# Altium PCB EB2_Cyclone_1_03.PcbDoc (part 2 of 4)
Units mm, origin at the board's own origin, x right, y up, seen from the top; angles counter-clockwise.
Board outline 165.1 x 115.01 mm, 6 copper layers (Top Layer, MidLayer1, VCC Plane, GND Plane, MidLayer2, Bottom Layer); 336 components, 379 nets, 1581 pads, 731 vias.
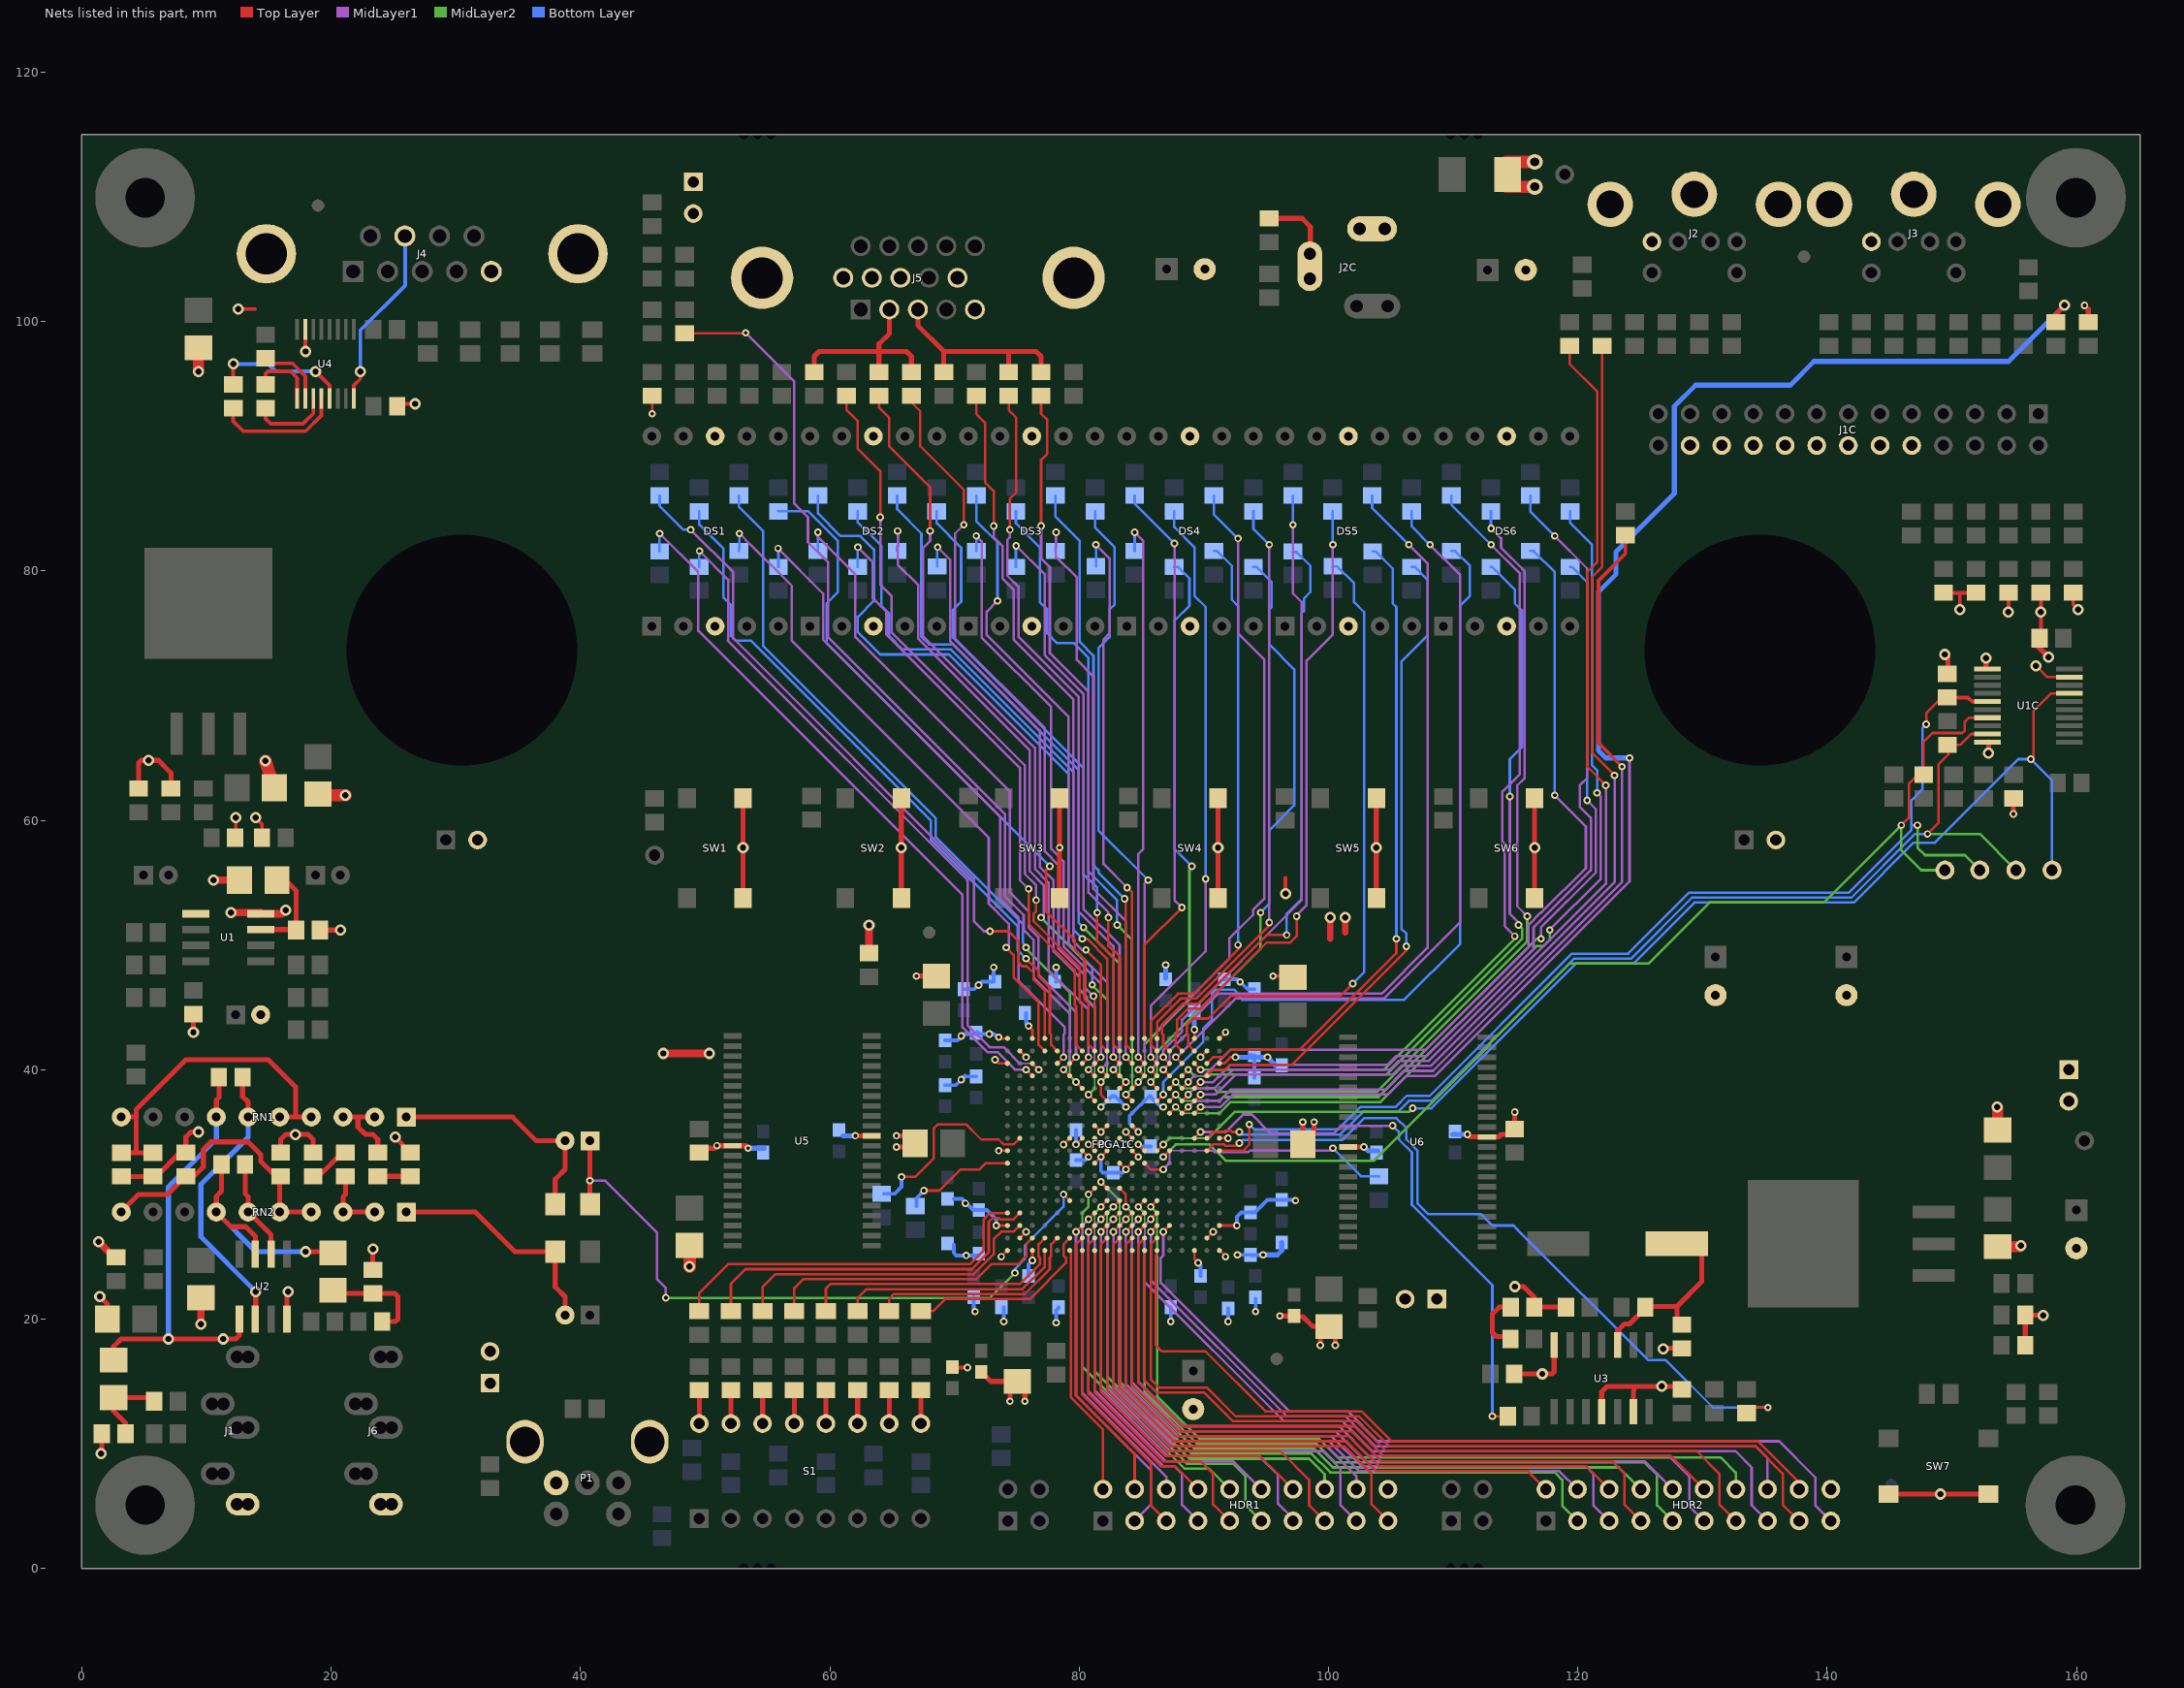
[diagram p6: the nets of this part, all layers, seen from the top]

## Via types
v1: diameter 0.6, hole 0.3, Top Layer to Bottom Layer, tented both sides, 433 vias
v2: diameter 1.6, hole 1, Top Layer to Bottom Layer, 191 vias
v3: diameter 0.9, hole 0.5, Top Layer to Bottom Layer, tented both sides, 105 vias
v4: diameter 1.27, hole 0.7, Top Layer to Bottom Layer, tented both sides, 2 vias

## Nets (pads, with @x,y where several pads share a name; then routed paths per layer and width w, separated by ;. In a path a pad name is that pad's centre, name@x,y a point inside that pad or via, vN(x,y) a via of type N, cw(c..) or ccw(c..) an arc to the next point about the centre after c; other vN are vias at no path point) (continued)
AUDIOR: C6.1 C40.1 FPGA1C.P6 | length 55.3
  Top Layer w0.2: v1(78.75,30) FPGA1C.P6@79.25,29.5
  Top Layer w0.4: C40.1@40.767,34.29 40.767,29.213 C6.1@40.77,29.21
  MidLayer1 w0.2: v1(40.75,31.1) 41.95,31.1 46.15,26.9 46.15,23.2 46.85,22.5 v1(46.85,21.7)
  MidLayer2 w0.2: v1(46.85,21.7) 49.316,21.7 69.35,21.7 72.85,21.7 v1(74.85,23.7) v1@74.75,23.6
  Bottom Layer w0.2: v1(74.85,23.7) 74.85,24 75.65,24.8 75.65,25.9 78.75,29 v1(78.75,30)
BLUE0: FPGA1C.B9 R106.1 | length 57.1
  Top Layer w0.2: R106.1@71.75,94.05 71.75,92.6 72.45,91.9 72.45,87.1 73.15,86.4 v1(73.15,83.6) ; v1(80.55,49.6) 81.75,48.4 81.75,42 FPGA1C.B9@82.25,41.5
  MidLayer1 w0.2: v1(73.15,83.6) 73.15,82.7 73.85,82 73.85,79.4 74.75,78.5 74.75,74.5 79.55,69.7 79.55,50.3 80.25,49.6 v1(80.55,49.6)
BLUE1: FPGA1C.C10 R108.1 | length 57.8
  Top Layer w0.2: R108.1@74.35,94.05 74.35,92.9 74.95,92.3 74.95,86.3 74.45,85.8 v1(74.45,83.3) ; v1(82.75,41) FPGA1C.C10@83.25,40.5
  MidLayer1 w0.2: v1(74.45,83.3) 74.45,82.7 74.25,82.5 74.25,79.6 75.15,78.7 75.15,74.7 79.95,69.9 79.95,52.7 82.75,49.9 v1(82.75,41)
BLUE2: FPGA1C.A10 R111.1 | length 54.6
  Top Layer w0.2: v1(76.95,83.6) 76.95,88.9 77.45,89.4 77.45,92.1 76.95,92.6 R111.1@76.95,94.05 ; v1(82.35,52.2) 82.35,49.931 82.816,49.466 ; 82.85,49.5 83.25,49.1 FPGA1C.A10@83.25,42.5
  MidLayer1 w0.2: v1(76.95,83.6) 76.95,81 77.65,80.3 77.65,73.4 80.75,70.3 80.75,54.2 82.35,52.6 v1(82.35,52.2)
BLUE#: J5.3 R107.2 R108.2 R111.2 | length 16.7
  Top Layer w0.4: J5.3@67.064,100.965 67.064,99.686 69.15,97.6 ; R107.2@69.15,95.95 69.15,97.6 ; R108.2@74.35,95.95 74.35,97.6 ; R111.2@76.95,96 76.95,97.2 76.55,97.6 74.35,97.6 ; 69.15,97.6 74.35,97.6
CTS: J4.7 U4.8 | length 14.8
  Top Layer w0.3: U4.8@21.825,93.825 21.825,94.875 22.35,95.4 v3(22.35,96)
  Bottom Layer w0.3: v3(22.35,96) 22.35,99.3 25.95,102.9 25.95,106.825 J4.7@25.92,106.855
DIG0_SEG0: FPGA1C.E7 R25.2 | length 59
  Top Layer w0.2: v1(79.75,39) FPGA1C.E7@80.25,38.5
  MidLayer2 w0.14: 79.25,39.5 79.25,41.5
  MidLayer2 w0.2: v1@75.65,49.8 75.7,49.75 77.55,47.9 79.25,46.2 79.25,41.5 ; 79.25,39.5 v1(79.75,39)
  Bottom Layer w0.2: R25.2@52.705,86.045 52.705,85.145 54.65,83.2 54.65,74 68.499,60.151 68.499,58.651 75.48,51.67 75.48,50.17 75.75,49.9 v1(75.75,49.8)
DIG0_SEG1: FPGA1C.B8 R29.2 | length 56.2
  Top Layer w0.2: v1(77.65,56.3) 77.35,56 77.35,52.7 79.66,50.39 79.66,49.59 80.102,49.148 80.45,48.8 80.45,45.6 80.75,45.3 80.75,42 FPGA1C.B8@81.25,41.5
  Bottom Layer w0.2: R29.2@55.88,84.775 58.275,84.775 60.65,82.4 60.65,78.3 59.75,77.4 59.75,74.2 v1(77.65,56.3)
DIG0_SEG2: FPGA1C.B4 R33.2 | length 53.2
  Top Layer w0.2: v1(74.15,49.8) 74.75,49.2 74.75,47.4 76.75,45.4 76.75,42 FPGA1C.B4@77.25,41.5
  MidLayer1 w0.2: v1(52.75,83) 53.643,82.093 ; 53.65,82.1 56.95,78.8 56.95,74.4 72.75,58.6 72.75,53.3 74.35,51.7 74.35,50 v1(74.15,49.8)
  Bottom Layer w0.2: R33.2@52.705,81.595 52.705,81.755 52.75,81.8 v1(52.75,83)
DIG0_SEG3: FPGA1C.C3 R37.2 | length 56.1
  Top Layer w0.2: FPGA1C.C3@76.25,40.5 v1(76.75,40)
  MidLayer1 w0.14: 75.25,40.5 76.25,40.5
  MidLayer1 w0.2: v1(49.55,81.6) 51.85,79.3 51.85,74.4 ; 51.825,74.4 71.025,55.2 ; 71.05,55.2 71.05,43.566 72.816,41.8 73.95,41.8 75.25,40.5 ; 76.25,40.5 v1(76.75,40)
  Bottom Layer w0.2: R37.2@49.53,80.325 49.53,81.58 v1(49.55,81.6)
DIG0_SEG4: FPGA1C.D3 R41.2 | length 58.3
  Top Layer w0.2: v1(75.75,40) FPGA1C.D3@76.25,39.5
  MidLayer1 w0.2: v1(46.35,83) 49.45,79.9 49.45,75.2 70.65,54 70.65,43.4 72.65,41.4 73.45,41.4 74.85,40 v1(75.75,40)
  Bottom Layer w0.2: R41.2@46.35,81.57 v1(46.35,83)
DIG0_SEG5: FPGA1C.B5 R45.2 | length 55.9
  Top Layer w0.2: v1(75.75,48.9) 76.75,47.9 76.75,47.5 77.65,46.6 77.65,42.9 77.75,42.8 77.75,42 FPGA1C.B5@78.25,41.5
  Bottom Layer w0.2: R45.2@49.53,84.775 49.53,83.72 51.45,81.8 51.45,77.9 52.05,77.3 52.05,74.8 52.45,74.4 53.684,74.4 68.099,59.985 68.099,58.451 75.08,51.47 75.08,49.57 v1(75.75,48.9)
DIG0_SEG6: FPGA1C.A4 R49.2 | length 58.1
  Top Layer w0.2: v1(72.85,51.1) 74.35,51.1 75.15,50.3 75.15,48.6 75.45,48.3 75.784,48.3 76.35,47.734 76.35,47.2 77.25,46.3 FPGA1C.A4@77.25,42.5
  MidLayer1 w0.2: v1(48.85,83.3) 52.25,79.9 52.25,74.6 71.55,55.3 71.55,51.9 72.35,51.1 v1(72.85,51.1)
  Bottom Layer w0.2: R49.2@46.355,86.045 46.355,85.195 48.25,83.3 v1(48.85,83.3)
DIG0_SEG7: FPGA1C.C5 R53.2 | length 52.6
  Top Layer w0.2: FPGA1C.C5@78.25,40.5 v1(78.75,41)
  MidLayer1 w0.2: v1(55.85,81.8) 59.475,78.175 59.475,74.475 73.65,60.3 73.65,53.7 75.15,52.2 75.15,51 75.15,47.1 78.85,43.4 78.85,42.9 78.75,42.8 v1(78.75,41)
  Bottom Layer w0.2: v1(55.85,81.8) 55.88,81.77 R53.2@55.88,80.325
DIG1_SEG0: FPGA1C.E10 R26.2 | length 56.5
  Top Layer w0.2: FPGA1C.E10@83.25,38.5 v1(83.75,39)
  MidLayer2 w0.14: 83.25,39.5 83.25,41.5
  MidLayer2 w0.2: v1(80.35,51.4) 83.25,48.5 83.25,41.5 ; 83.25,39.5 v1(83.75,39)
  Bottom Layer w0.2: R26.2@65.405,86.045 65.405,84.945 67.35,83 67.35,74.7 67.95,74.1 69.884,74.1 79.95,64.034 79.95,51.8 v1(80.35,51.4)
DIG1_SEG1: FPGA1C.B10 R30.2 | length 49.9
  Top Layer w0.2: v1(81.45,52.6) 81.45,50.266 82.75,48.966 82.75,42 FPGA1C.B10@83.25,41.5
  Bottom Layer w0.2: R30.2@68.58,84.775 68.58,83.82 70.536,81.864 70.536,77.521 69.85,76.835 69.85,74.7 80.35,64.2 80.35,55.7 81.45,54.6 v1(81.45,52.6)
DIG1_SEG2: FPGA1C.F8 R34.2 | length 54.4
  Top Layer w0.2: v1(80.75,38) FPGA1C.F8@81.25,37.5
  MidLayer1 w0.2: v1(65.45,83.2) 65.45,80.5 67.101,78.849 67.101,74.549 76.05,65.6 76.05,55.9 77.15,54.8 77.15,52.4 v1(76.95,52.2)
  MidLayer2 w0.14: 81.25,38.5 81.25,41.5
  MidLayer2 w0.2: v1(76.95,52.2) 80.45,48.7 80.45,45.8 81.25,45 81.25,41.5 ; v1(80.75,38) 81.25,38.5
  Bottom Layer w0.2: R34.2@65.405,81.595 65.405,81.955 65.45,82 v1(65.45,83.2)
DIG1_SEG3: FPGA1C.B7 R38.2 | length 49.4
  Top Layer w0.2: v1(75.95,54.5) 75.95,51.7 79.65,48 79.65,45.2 79.75,45.1 79.75,42 FPGA1C.B7@80.25,41.5
  MidLayer1 w0.2: v1(62.25,81.9) 63.45,80.7 63.45,77.8 64.55,76.7 64.55,74.9 75.25,64.2 75.25,55.2 v1(75.95,54.5)
  Bottom Layer w0.2: R38.2@62.23,80.325 62.23,80.48 62.25,80.5 v1(62.25,81.9)
DIG1_SEG4: FPGA1C.C6 R42.2 | length 52.9
  Top Layer w0.2: FPGA1C.C6@79.25,40.5 v1(79.75,41)
  MidLayer1 w0.2: v1(59.05,83.1) 59.05,82.7 62.05,79.7 62.05,74.7 74.45,62.3 74.45,54.2 75.95,52.7 75.95,51.4 76.75,50.6 76.75,47.6 79.75,44.6 v1(79.75,41)
  Bottom Layer w0.2: v1(59.05,83.1) 59.055,83.095 R42.2@59.055,81.595
DIG1_SEG5: FPGA1C.A9 R46.2 | length 53.1
  Top Layer w0.2: v1(80.25,50.5) 80.65,50.5 82.25,48.9 FPGA1C.A9@82.25,42.5
  Bottom Layer w0.2: R46.2@62.23,84.775 62.23,83.92 64.15,82 64.15,77.2 64.75,76.6 64.75,74.8 65.85,73.7 69.719,73.7 79.55,63.869 79.55,51.2 v1(80.25,50.5)
DIG1_SEG6: FPGA1C.F9 R50.2 | length 63.8
  Top Layer w0.2: v1(81.75,39) 81.75,38 FPGA1C.F9@82.25,37.5
  MidLayer2 w0.14: 82.25,39.5 82.25,41.5
  MidLayer2 w0.2: v1(81.05,46.8) 82.25,45.6 82.25,41.5 ; v1(81.75,39) 82.25,39.5
  Bottom Layer w0.2: R50.2@59.055,86.045 59.055,84.595 60.85,82.8 62.45,82.8 63.55,81.7 63.55,77.6 62.25,76.3 62.25,75.1 64.05,73.3 69.553,73.3 79.15,63.703 79.15,50.1 81.05,48.2 v1(81.05,46.8)
DIG1_SEG7: FPGA1C.D8 R54.2 | length 49.6
  Top Layer w0.2: v1(80.75,40) FPGA1C.D8@81.25,39.5
  MidLayer1 w0.14: 81.25,40.5 81.25,41.5
  MidLayer1 w0.2: v1(68.65,81.9) 69.65,80.9 69.65,74.4 76.85,67.2 76.85,56.266 77.95,55.166 77.95,49.5 80.05,47.4 80.05,46.4 80.629,45.821 80.629,45.521 81.25,44.9 81.25,41.5 ; v1(80.75,40) 81.25,40.5
  Bottom Layer w0.2: R54.2@68.623,80.347 68.623,81.873 v1(68.65,81.9)
DIG2_SEG0: FPGA1C.B11 R27.2 | length 47.1
  Top Layer w0.2: v1(83.65,53.7) 83.75,53.6 83.75,42 FPGA1C.B11@84.25,41.5
  Bottom Layer w0.2: R27.2@78.105,86.045 78.105,84.345 80.05,82.4 80.05,74.3 81.15,73.2 81.15,56.4 81.55,56 81.55,55.8 v1(83.65,53.7)
DIG2_SEG1: FPGA1C.D12 R31.2 | length 48.7
  Top Layer w0.2: v1(84.75,40) FPGA1C.D12@85.25,39.5
  MidLayer1 w0.14: 85.25,40.5 85.25,41.5
  MidLayer1 w0.2: v1(84.75,40) 85.25,40.5 ; 85.25,41.5 85.25,54.9 v1(85.55,55.2)
  Bottom Layer w0.2: R31.2@81.28,84.775 81.28,83.47 82.85,81.9 82.85,77.3 82.45,76.9 82.45,74.7 81.55,73.8 81.55,59.2 v1(85.55,55.2)
DIG2_SEG2: FPGA1C.C11 R35.2 | length 46.7
  Top Layer w0.2: v1(83.75,41) FPGA1C.C11@84.25,40.5
  MidLayer1 w0.2: v1(78.15,83.1) 78.15,81.1 79.814,79.466 79.814,72.866 81.15,71.5 81.15,54.5 83.75,51.9 v1(83.75,41)
  Bottom Layer w0.2: R35.2@78.105,81.595 78.105,81.855 78.15,81.9 v1(78.15,83.1)
DIG2_SEG3: FPGA1C.D10 R39.2 | length 48
  Top Layer w0.2: v1(82.75,40) FPGA1C.D10@83.25,39.5
  MidLayer1 w0.14: 83.25,40.5 83.25,41.5
  MidLayer1 w0.2: v1(74.95,82) 77.25,79.7 77.25,73.234 80.35,70.134 80.35,52.9 83.25,50 83.25,41.5 ; v1(82.75,40) 83.25,40.5
  Bottom Layer w0.2: R39.2@74.93,80.325 74.93,81.98 v1(74.95,82)
DIG2_SEG4: FPGA1C.C8 R43.2 | length 48.1
  Top Layer w0.2: FPGA1C.C8@81.25,40.5 v1(81.75,41) v1@81.604,40.854
  MidLayer1 w0.2: v1(71.75,82.8) 72.187,82.363 72.187,74.651 77.75,69.1 77.75,57.7 78.75,56.7 78.75,49.9 81.75,46.9 v1(81.75,41)
  Bottom Layer w0.2: v1(71.75,82.8) 71.755,82.795 R43.2@71.755,81.595
DIG2_SEG5: FPGA1C.F11 R47.2 | length 52.3
  Top Layer w0.2: v1(83.75,38) FPGA1C.F11@84.25,37.5
  MidLayer2 w0.14: 84.25,38.5 84.25,41.5
  MidLayer2 w0.2: v1(83.05,51.6) 84.25,50.4 84.25,41.5 ; v1(83.75,38) 84.25,38.5
  Bottom Layer w0.2: R47.2@74.93,84.775 74.93,83.82 76.85,81.9 76.85,77.5 77.45,76.9 77.45,75 78.25,74.2 79.584,74.2 80.75,73.034 80.75,55.9 83.05,53.6 v1(83.05,51.6)
DIG2_SEG6: FPGA1C.D9 R51.2 | length 52
  Top Layer w0.2: v1(81.75,40) FPGA1C.D9@82.25,39.5
  MidLayer1 w0.14: 82.25,40.5 82.25,41.5
  MidLayer1 w0.2: v1(73.45,77.6) 72.593,76.733 72.593,74.854 79.15,68.3 79.15,50.1 82.25,47 82.25,41.5 ; v1(81.75,40) 82.25,40.5
  Bottom Layer w0.2: R51.2@71.755,86.045 71.755,83.995 73.45,82.3 v1(73.45,77.6)
DIG2_SEG7: FPGA1C.A11 R55.2 | length 43.1
  Top Layer w0.2: v1(83.85,54.6) 84.25,54.2 FPGA1C.A11@84.25,42.5
  MidLayer1 w0.2: v1(81.35,82.1) 82.45,81 82.45,75 81.95,74.5 81.95,56.5 v1@83.95,54.5
  Bottom Layer w0.2: R55.2@81.35,80.37 v1(81.35,82.1)
DIG3_SEG0: FPGA1C.D13 R28.2 | length 52.2
  Top Layer w0.2: v1(85.75,40) FPGA1C.D13@86.25,39.5
  MidLayer1 w0.14: 86.25,40.5 86.25,41.5
  MidLayer1 w0.2: v1(85.75,40) 86.25,40.5 ; 86.25,41.5 86.25,43.1 92.05,48.9 92.05,50.5 93.95,52.4 93.95,52.8 94.85,53.7 94.85,72.9 92.75,75 v1(92.75,82.6)
  Bottom Layer w0.2: R28.2@90.805,86.045 90.805,84.545 v1(92.75,82.6)
DIG3_SEG1: FPGA1C.A13 R32.2 | length 47.3
  Top Layer w0.2: FPGA1C.A13@86.25,42.5 86.25,43.8 88.15,45.7 89.384,45.7 95.25,51.566 v1(95.25,51.8)
  MidLayer1 w0.2: v1(95.25,51.8) v1(95.25,82.1)
  Bottom Layer w0.2: R32.2@93.98,84.775 93.98,83.37 v1(95.25,82.1)
DIG3_SEG2: FPGA1C.B13 R36.2 | length 44.9
  Top Layer w0.2: FPGA1C.B13@86.25,41.5 85.75,42 85.75,43.9 87.95,46.1 89.219,46.1 92.75,49.631 v1(92.75,50)
  Bottom Layer w0.2: R36.2@90.805,81.595 91.055,81.595 92.25,80.4 92.25,77.7 92.75,77.2 v1(92.75,50)
DIG3_SEG3: FPGA1C.E11 R40.2 | length 45.6
  Top Layer w0.2: FPGA1C.E11@84.25,38.5 v1(84.75,39)
  MidLayer2 w0.14: 85.25,39.5 85.25,41.5
  MidLayer2 w0.2: v1(84.75,39) 85.25,39.5 ; 85.25,41.5 85.25,42 88.85,45.6 88.85,56.1 v1(89.05,56.3)
  Bottom Layer w0.2: R40.2@87.63,80.325 87.925,80.325 88.85,79.4 88.85,77.2 87.65,76 87.65,57.7 v1(89.05,56.3)
DIG3_SEG4: FPGA1C.C12 R44.2 | length 44.8
  Top Layer w0.2: v1(84.75,41) FPGA1C.C12@85.25,40.5
  MidLayer1 w0.2: v1(84.45,83.1) 85.15,82.4 85.15,57.7 84.75,57.3 v1(84.75,41)
  Bottom Layer w0.2: v1(84.45,83.1) 84.455,83.095 R44.2@84.455,81.595
DIG3_SEG5: FPGA1C.C13 R48.2 | length 47.3
  Top Layer w0.2: v1(85.75,41) FPGA1C.C13@86.25,40.5
  MidLayer1 w0.2: v1(85.75,41) 85.75,45.1 90.15,49.5 v1(90.15,55.3)
  Bottom Layer w0.2: R48.2@87.63,84.775 87.63,83.52 89.25,81.9 89.25,78 90.15,77.1 v1(90.15,55.3)
DIG3_SEG6: FPGA1C.A12 R52.2 | length 46.4
  Top Layer w0.2: FPGA1C.A12@85.25,42.5 85.25,50 v1(88.25,53)
  MidLayer1 w0.2: v1(87.65,82.2) 87.65,53.6 v1(88.25,53)
  Bottom Layer w0.2: R52.2@84.455,86.045 84.455,85.395 v1(87.65,82.2)
DIG3_SEG7: FPGA1C.E13 R56.2 | length 48.6
  Top Layer w0.2: v1(85.75,39) FPGA1C.E13@86.25,38.5
  MidLayer2 w0.14: 86.25,39.5 86.25,41.5
  MidLayer2 w0.2: v1(85.75,39) 86.25,39.5 ; 86.25,41.4 94.55,49.7 v1(94.55,52.6)
  Bottom Layer w0.2: R56.2@93.98,80.325 94.225,80.325 95.45,79.1 95.45,77.1 95.25,76.9 95.25,74.1 97.25,72.1 97.25,61.2 95.25,59.2 95.25,53.3 v1(94.55,52.6)
DIG4_SEG0: FPGA1C.D14 R57.2 | length 65.1
  Top Layer w0.2: v1(86.75,40) FPGA1C.D14@87.25,39.5
  MidLayer1 w0.14: 87.25,40.5 87.25,41.5
  MidLayer1 w0.2: v1(86.75,40) 87.25,40.5 ; 87.25,41.5 88.65,42.9 88.65,43.634 ; 88.65,43.6 91.15,46.1 104.284,46.1 107.95,49.766 107.95,80.6 v1(106.45,82.1)
  Bottom Layer w0.2: R57.2@103.505,86.045 103.505,85.045 v1(106.45,82.1)
DIG4_SEG1: FPGA1C.C15 R59.2 | length 62.6
  Top Layer w0.2: v1(87.75,41) FPGA1C.C15@88.25,40.5
  MidLayer1 w0.2: v1(87.75,41) 87.85,41 92.55,45.7 104.45,45.7 110.55,51.8 110.55,79.7 v1(108.15,82.1)
  Bottom Layer w0.2: R59.2@106.68,84.775 106.68,83.57 v1(108.15,82.1)
DIG4_SEG2: FPGA1C.C17 R61.2 | length 52
  Top Layer w0.2: FPGA1C.C17@90.25,40.5 90.75,41 91.55,41 92.15,41.6 97.719,41.6 105.45,49.331 v1(105.45,50.5)
  Bottom Layer w0.2: R61.2@103.55,81.57 103.78,81.57 105.15,80.2 105.15,77.4 105.45,77.1 v1(105.45,50.5)
DIG4_SEG3: FPGA1C.B16 R63.2 | length 52.1
  Top Layer w0.2: FPGA1C.B16@89.25,41.5 88.75,42 88.75,42.8 88.65,42.9 88.65,43.6 89.15,44.1 90.35,44.1 92.15,45.9 100.95,45.9 v1(101.95,46.9)
  Bottom Layer w0.2: R63.2@100.35,80.37 100.68,80.37 102.05,79 102.05,77.5 102.85,76.7 102.85,47.8 v1(101.95,46.9)
DIG4_SEG4: FPGA1C.B14 R65.2 | length 47.6
  Top Layer w0.2: FPGA1C.B14@87.25,41.5 86.75,42 86.75,42.8 86.65,42.9 86.65,43.6 88.35,45.3 89.55,45.3 95.05,50.8 v1(96.65,50.8)
  Bottom Layer w0.2: v1(96.65,50.8) 96.65,52.5 97.85,53.7 97.85,76.6 98.05,76.8 98.05,77.8 98.55,78.3 98.55,80.4 97.45,81.5 R65.2@97.15,81.5
DIG4_SEG5: FPGA1C.B15 R67.2 | length 50.4
  Top Layer w0.2: FPGA1C.B15@88.25,41.5 87.75,42 87.75,42.8 87.85,42.9 87.85,44 88.75,44.9 89.75,44.9 95.05,50.2 96.95,50.2 97.45,50.7 v1(97.45,52.3)
  MidLayer1 w0.2: v1@97.35,52.3 98.25,53.2 98.25,72.8 100.35,74.9 v1(100.35,82.1)
  Bottom Layer w0.2: R67.2@100.33,84.775 100.33,84.22 100.35,84.2 v1(100.35,82.1)
DIG4_SEG6: FPGA1C.C14 R69.2 | length 50.6
  Top Layer w0.2: v1(86.75,41) FPGA1C.C14@87.25,40.5
  MidLayer1 w0.2: v1(86.75,41) 86.75,41.566 88.25,43.066 88.25,44 97.85,53.6 97.85,77.5 97.15,78.2 v1(97.15,83.7)
  Bottom Layer w0.2: v1(97.15,83.7) 97.15,85.6 97.155,85.605 R69.2@97.155,86.045
DIG4_SEG7: FPGA1C.D17 R71.2 | length 52.6
  Top Layer w0.2: FPGA1C.D17@90.25,39.5 90.75,40 91.719,40 92.119,40.4 97.084,40.4 106.25,49.566 v1(106.25,49.9)
  Bottom Layer w0.2: v1(106.25,49.9) 106.25,50.9 105.85,51.3 105.85,72.7 107.95,74.8 107.95,79.3 106.925,80.325 R71.2@106.68,80.325
DIG5_SEG0: FPGA1C.E16 R58.2 | length 72.6
  Top Layer w0.2: FPGA1C.E16@89.25,38.5 v1(89.75,39)
  MidLayer1 w0.2: v1(89.75,39) 90.75,39 92.15,40.4 104.75,40.4 105.45,41.1 107.887,41.1 116.45,49.663 116.45,51.4 121.05,56 121.05,60.2 120.15,61.1 120.15,62.8 120.75,63.4 120.75,80.2 v1(118.15,82.8)
  Bottom Layer w0.2: R58.2@116.205,86.045 116.205,84.745 v1(118.15,82.8)
DIG5_SEG1: FPGA1C.G14 R60.2 | length 73.8
  Top Layer w0.2: FPGA1C.G14@87.25,36.5 v1(87.75,37)
  MidLayer1 w0.2: v1(117.75,51.2) 121.85,55.3 121.85,61.9 v1(121.55,62.2)
  MidLayer2 w0.14: 88.25,36.5 90.25,36.5
  MidLayer2 w0.2: v1(87.75,37) 88.25,36.5 ; 90.25,36.5 91.25,36.5 92.15,37.4 104.181,37.4 116.681,49.9 117.25,49.9 117.75,50.4 v1(117.75,51.2)
  Bottom Layer w0.2: R60.2@119.38,84.775 119.38,83.87 121.15,82.1 121.15,64.4 121.55,64 v1(121.55,62.2)
DIG5_SEG2: FPGA1C.E15 R62.2 | length 68.2
  Top Layer w0.2: FPGA1C.E15@88.25,38.5 v1(88.75,39)
  MidLayer1 w0.14: 89.25,39.5 90.05,39.5
  MidLayer1 w0.2: v1(88.75,39) 89.25,39.5 ; 90.05,39.5 92.15,41.6 107.822,41.6 116.05,49.828 116.05,51.6 117.05,52.6 117.084,52.6 120.65,56.166 120.65,59.5 v1(118.15,62)
  Bottom Layer w0.2: R62.2@116.205,81.595 116.455,81.595 118.15,79.9 v1(118.15,62)
DIG5_SEG3: FPGA1C.D15 R64.2 | length 64.1
  Top Layer w0.2: FPGA1C.D15@88.25,39.5 v1(88.75,40)
  MidLayer1 w0.2: v1(114.55,61.9) 114.55,52.5 115.25,51.8 v1(115.25,51.6)
  MidLayer2 w0.14: 89.25,39.5 90.25,39.5 ; 90.381,39.5 90.45,39.5
  MidLayer2 w0.2: v1(88.75,40) 89.25,39.5 ; 90.25,39.5 90.45,39.5 90.55,39.6 104.65,39.6 115.55,50.5 115.55,51.3 v1(115.25,51.6)
  Bottom Layer w0.2: R64.2@113.03,80.325 113.125,80.325 114.95,78.5 114.95,77.4 115.55,76.8 115.55,65.9 114.55,64.9 v1(114.55,61.9)
DIG5_SEG4: FPGA1C.F13 R66.2 | length 65.3
  Top Layer w0.2: FPGA1C.F13@86.25,37.5 v1(86.75,38)
  Bottom Layer w0.2: v1(86.75,38) 86.75,39 89.95,42.2 89.95,43.3 90.65,44 90.65,46.1 90.95,46.4 92.45,46.4 92.682,46.168 92.682,46.068 ; 92.682,46 93.082,45.6 106.084,45.6 110.55,50.066 110.55,77.2 111.35,78 111.35,80.4 110.155,81.595 R66.2@109.855,81.595
DIG5_SEG5: FPGA1C.E14 R68.2 | length 70.4
  Top Layer w0.2: FPGA1C.E14@87.25,38.5 v1(87.75,39)
  MidLayer1 w0.2: v1(113.05,83.4) 113.85,82.6 113.85,81.866 115.75,79.966 115.75,63.4 115.15,62.8 115.15,53.1 v1(115.95,52.3)
  MidLayer2 w0.14: 88.25,38.5 90.25,38.5
  MidLayer2 w0.2: v1(87.75,39) 88.25,38.5 ; 90.25,38.5 90.816,38.5 91.116,38.2 103.85,38.2 115.95,50.3 v1(115.95,52.3)
  Bottom Layer w0.2: R68.2@113.03,84.775 113.03,83.42 v1(113.05,83.4)
DIG5_SEG6: FPGA1C.C16 R70.2 | length 69.1
  Top Layer w0.2: FPGA1C.C16@89.25,40.5 v1(89.75,40)
  MidLayer1 w0.2: v1(113.05,82.1) 115.35,79.8 115.35,63.7 113.95,62.3 113.95,58.3 114.15,58.1 114.15,51.5 v1(114.95,50.7)
  MidLayer2 w0.2: v1(89.75,40) 104.484,40 114.95,50.466 v1(114.95,50.7)
  Bottom Layer w0.2: R70.2@109.855,86.045 109.855,85.295 v1(113.05,82.1)
DIG5_SEG7: FPGA1C.F14 R72.2 | length 68.2
  Top Layer w0.2: FPGA1C.F14@87.25,37.5 v1(87.75,38)
  MidLayer1 w0.2: v1(117.05,50.5) 117.05,51.4 121.45,55.8 121.45,60.9 v1(120.75,61.6)
  MidLayer2 w0.14: 88.25,37.5 90.25,37.5
  MidLayer2 w0.2: v1(87.75,38) 88.25,37.5 ; 90.25,37.5 91.25,37.5 91.55,37.8 104.016,37.8 116.716,50.5 v1(117.05,50.5)
  Bottom Layer w0.2: R72.2@119.38,80.325 119.525,80.325 120.75,79.1 v1(120.75,61.6)
FCLK: FPGA1C.J16 R122.1 | length 45.4
  Top Layer w0.2: FPGA1C.J16@89.25,34.5 v1(89.75,35) ; v1(113.15,12.2) R122.1@114.4,12.2
  MidLayer1 w0.2: v1(89.75,35) 91.75,35 93.15,36.4 93.85,36.4 95.35,34.9 100.45,34.9 101.05,35.5 v1(105.15,35.5)
  Bottom Layer w0.2: v1(105.15,35.5) 105.65,35 105.65,34.4 106.692,33.358 106.692,29.158 113.15,22.7 v1(113.15,12.2)
FPGA_CCLK: FPGA1C.L1 R7C.2 | length 9.1
  Top Layer w0.2: v1(67.553,30.297) 68.782,30.297 70.484,32 72.019,32 72.519,32.5 FPGA1C.L1@74.25,32.5
  Bottom Layer w0.3: R7C.2@66.953,29.05 66.953,29.697 v1(67.553,30.297)
FPGA_NSTATUS: FPGA1C.L12 R9C.2 | length 21.2
  Top Layer w0.2: FPGA1C.L12@85.25,32.5 85.75,32 v1(86.75,32)
  MidLayer1 w0.14: 87.25,32.5 87.25,33.3 87.45,33.5 90.25,33.5
  MidLayer1 w0.2: v1(86.75,32) 87.25,32.5 ; 90.25,33.5 90.75,33.5 90.85,33.4 93.587,33.4 93.687,33.5 100.15,33.5 v1(100.35,33.7)
  Bottom Layer w0.2: v1(100.35,33.7) 102.6,31.45 R9C.2@104.053,31.45
FPGA_PROGRAM: FPGA1C.J2 R8C.2 | length 15.9
  Top Layer w0.2: v1(65.75,31.4) 66.85,31.4 67.554,32.104 68.35,32.9 68.35,35.3 68.65,35.6 70.95,35.6 72.15,34.4 73.55,34.4 73.95,34 74.75,34 FPGA1C.J2@75.25,34.5
  Bottom Layer w0.3: R8C.2@64.353,30.05 65.2,30.05 65.75,30.6 v1(65.75,31.4)
GND: C1C.2 C2C.2 C3.2 C3C.2 C4.2 C4C.2 C5.2 C5C.2 C6C.2 C7C.2 C8C.2 C9.1 C9C.2 C10C.2 C11.1 C11C.2 C12C.2 C13C.2 C14.1 C14C.2 C15.1 C15C.2 C16.1 C16C.2 C17.1 C17C.2 C18.2 C18C.2 C19.2 C19C.2 C20C.2 C21C.2 C22C.2 C23.2 C23C.2 C24.2 C24C.2 C25.1 C25C.2 C26.1 C26C.2 C27.1 C27C.2 C28.1 C28C.2 C29.1 C29C.2 C30.1 C30C.2 C31.2 C31C.2 C32.1 C32C.2 C33C.2 C34.1 C34C.2 C35C.2 C36C.2 C37.2 C37C.2 C38C.2 C39.1 C39C.2 C40C.2 C43C.2 C44C.2 C45C.2 C46C.2 C47C.2 C48C.2 C49C.2 C51C.2 C52C.2 C53C.2 C54C.2 C55C.2 C56C.2 C57C.2 C58C.2 C60C.2 C61C.2 C62C.2 C63C.2 C64C.2 C65C.2 C66C.2 C67C.2 C68C.2 C69C.2 C70C.2 C71C.2 D1C.1 DS1.3 DS1.8 DS2.3 DS2.8 DS3.3 DS3.8 DS4.3 DS4.8 DS5.3 DS5.8 DS6.3 DS6.8 FPGA1C.A1 FPGA1C.A3 FPGA1C.A16 FPGA1C.A18 FPGA1C.B2 FPGA1C.B17 FPGA1C.C1 FPGA1C.C18 FPGA1C.H8 FPGA1C.H9 FPGA1C.H11 FPGA1C.J6 FPGA1C.J7 FPGA1C.J8 FPGA1C.J10 FPGA1C.J11 FPGA1C.J18 FPGA1C.K1 FPGA1C.K7 FPGA1C.K8 FPGA1C.K9 FPGA1C.K11 FPGA1C.K12 FPGA1C.L8 FPGA1C.L10 FPGA1C.L11 FPGA1C.T1 FPGA1C.T18 FPGA1C.U2 FPGA1C.U17 FPGA1C.V1 FPGA1C.V3 FPGA1C.V16 FPGA1C.V18 GJ1C.1 GJ1C.2 GJ2C.1 GJ2C.2 GJ3C.1 GJ3C.2 GJ4C.1 GJ4C.2 HDR1.20 HDR2.20 J1.1 J1.1A J1.1B J1C.18 J1C.19 J1C.20 J1C.21 J1C.22 J1C.23 J1C.24 J1C.25 J2.3 J2.MH1 J2.MH2 J2.MH3 J2C.2 J2C.2A J2C.2B J2C.3 J2C.3A J2C.3B J3.3 J3.MH1 J3.MH2 J3.MH3 J4.5 J4.10 J4.11 J5.5 J5.6 J5.7 J5.8 J5.10 J5.16 J5.17 J6.1 J6.1A J6.1B LS1.2 LS2.2 P1.3 P1.6 P1.7 R4.2 R5.2 R5C.2 R6C.2 R8.2 R29C.1 R30C.1 R32C.1 R33C.2 R74.1 R75.1 R76.1 R77.1 R78.1 R79.1 R80.1 R81.1 R83.1 R120.1 R121.1 S1.9 S1.10 S1.11 S1.12 S1.13 S1.14 S1.15 S1.16 SW1.3 SW1.4 SW2.3 SW2.4 SW3.3 SW3.4 SW4.3 SW4.4 SW5.3 SW5.4 SW6.3 SW6.4 SW7.3 SW7.4 U1.4 U1.5 U1C.1 U1C.10 U1C.19 U2.4 U3.7 U3.11 U3.13 U4.15 U5.12 U5.34 U6.12 U6.34 | length 351.8
  Top Layer w0.2: v1(45.75,92.6) C24.2@45.75,94.05 ; v1(73.25,40.8) 73.55,40.5 FPGA1C.C1@74.25,40.5 ; v1(73.35,27.5) FPGA1C.T1@74.25,27.5 ; v1(73.55,33.5) FPGA1C.K1@74.25,33.5 ; v1@73.55,42.5 FPGA1C.A1@74.25,42.5 ; v1(73.75,25) FPGA1C.V1@74.25,25.5 ; FPGA1C.U2@75.25,26.5 v1(75.75,27) ; FPGA1C.B2@75.25,41.5 v1(75.75,41) ; v1(75.95,43.5) 76.25,43.2 ; v1(76.25,24.7) FPGA1C.V3@76.25,25.5 ; v1(78.75,34) FPGA1C.J6@79.25,34.5 ; v1(79.75,34) FPGA1C.J7@80.25,34.5 ; FPGA1C.K7@80.25,33.5 v1(80.75,33) ; v1(80.75,34) FPGA1C.K8@81.25,33.5 ; FPGA1C.L8@81.25,32.5 FPGA1C.K9@82.25,33.5 ; FPGA1C.J8@81.25,34.5 v1(81.75,34) ; FPGA1C.H8@81.25,35.5 v1(81.75,35) FPGA1C.H9@82.25,35.5 ; FPGA1C.L10@83.25,32.5 v1(83.75,32) FPGA1C.L11@84.25,32.5 ; FPGA1C.J10@83.25,34.5 v1(83.75,34) ; v1(83.75,35) FPGA1C.J11@84.25,34.5 ; FPGA1C.K11@84.25,33.5 v1(84.75,33) ; FPGA1C.H11@84.25,35.5 v1(84.75,35) ; v1(84.75,34) FPGA1C.K12@85.25,33.5 ; FPGA1C.V16@89.25,25.5 89.25,24.8 v1(89.55,24.5) ; FPGA1C.A16@89.25,42.5 v1(89.25,43.2) ; v1(89.75,41) FPGA1C.B17@90.25,41.5 ; FPGA1C.U17@90.25,26.5 v1(90.75,27) ; FPGA1C.V18@91.25,25.5 v1(91.75,25) ; FPGA1C.J18@91.25,34.5 v1(91.95,34.5) ; FPGA1C.C18@91.25,40.5 91.653,40.5 92.153,41 v1(92.55,41) ; FPGA1C.A18@91.25,42.5 v1(91.75,43) ; 91.95,27.5 FPGA1C.T18@91.25,27.5 v1(92.65,27.5) ; v3(156.75,72.4) 157.675,71.475 U1C.19@159.425,71.475 ; 76.25,43.2 FPGA1C.A3@76.25,42.5 76.25,43.2
  Top Layer w0.3: R121.1@12.35,58.6 v3(12.35,60.2) ; v3(12.55,101) 13.9,101 ; v3(13.95,60.2) 14.45,59.7 R120.1@14.45,58.7 ; U4.15@17.925,99.375 17.925,97.625 v3(17.95,97.6) ; C23.2@25.15,93.4 25.3,93.4 v3(26.75,93.4) ; C19C.2@69.885,16.095 v1(71.05,16.1) ; v1(95.55,47.5) C3C.2@97.15,47.5 ; v3(96.55,54.1) 96.55,55.35 96.55,55.4 ; C61C.2@149.35,78.25 150.65,78.25 ; v3(150.65,76.9) 150.65,78.25 ; C60C.2@151.95,78.25 150.65,78.25 ; v3(154.55,76.7) C55C.2@154.55,78.25 ; C54C.2@157.15,74.8 v3(157.15,76.7) C58C.2@157.15,78.25 ; C57C.2@159.75,78.25 159.75,77.3 v3(160.15,76.9)
  Top Layer w0.4: v3(1.45,21.8) 2.05,21.2 C4.2@2.05,20 C4.2@2.05,19.9 ; v3(1.55,9.2) 1.6,9.25 R4.2@1.6,10.8 ; C9.1@3.175,31.435 C14.1@5.715,31.435 5.985,31.435 C11.1@7.95,33.4 ; R29C.1@4.55,62.55 4.55,64.6 4.75,64.8 v3(5.35,64.8) 6.15,64.8 7.15,63.8 R30C.1@7.15,62.55 ; C11.1@8.35,33.35 8.35,34.6 8.75,35 v3(9.35,35) ; v3(8.95,43) C39.1@8.95,44.45 ; C15.1@15.95,33.35 15.95,34.4 16.35,34.8 v3(17.15,34.8) 18.15,34.8 18.55,34.4 C17.1@18.55,33.35 ; U2.4@16.455,20 16.455,22.105 v3(16.55,22.2) ; C34.1@19.1,51.2 v3(20.75,51.2) ; R5.2@23.35,23.95 v3(23.35,25.6) ; v3(25.15,34.6) C16.1@26.35,33.35 C16.1@26.35,33.2 ; C26.1@49.35,33.7 49.53,33.7 50.75,33.7 v1(50.95,33.9) 50.96,33.89 U5.12@52.21,33.89 53.26,33.89 v1(53.45,33.7) ; S1.16@49.53,11.62 R74.1@49.53,14.29 ; S1.15@52.07,11.62 R75.1@52.07,14.29 ; SW1.3@53.04,53.775 v3(53.04,57.8) SW1.4@53.04,61.785 ; S1.14@54.61,11.62 R76.1@54.61,14.29 ; S1.13@57.15,11.62 R77.1@57.15,14.2 ; S1.12@59.69,11.62 R78.1@59.69,14.29 ; v1(62.05,34.7) 62.06,34.69 U5.34@63.36,34.69 ; S1.11@62.23,11.62 R79.1@62.23,14.29 ; S1.10@64.77,11.62 R80.1@64.77,14.29 ; v1(65.35,33.8) C2C.2@66.75,33.8 ; v1(65.35,34.7) C2C.2@66.75,34.7 ; SW2.3@65.74,53.775 v3(65.74,57.8) SW2.4@65.74,61.785 ; v1@67.05,47.5 C4C.2@68.55,47.5 ; S1.9@67.31,11.62 R81.1@67.31,14.29 ; C49C.2@72.15,15.75 72.9,15 C5C.2@75.05,15 ; v1(74.45,13.4) 74.45,14.5 75.05,15.1 75.65,14.5 v1(75.65,13.4) ; SW3.3@78.44,53.775 v1(78.44,57.8) SW3.4@78.44,61.785 ; SW4.3@91.14,53.775 v3(91.14,57.8) SW4.4@91.14,61.785 ; R83.1@95.25,108.265 97.885,108.265 98.55,107.6 98.55,105.435 J2C.3@98.55,105.2 ; v1(96.1,20.25) C69C.2@97.25,20.25 97.3,20.2 97.95,20.2 98.75,19.4 C6C.2@99.85,19.4 ; v1(97.95,35.8) C1C.2@97.95,34 98.85,34.9 v1(98.85,35.8) ; v1(99.35,17.9) C6C.2@99.35,19 ; v1(100.55,17.9) C6C.2@100.55,19.3 ; U6.12@101.575,33.8 v1(102.85,33.8) ; SW5.3@103.84,53.775 v3(103.84,57.8) SW5.4@103.84,61.785 ; v1(111.15,34.8) 111.35,34.6 U6.34@112.725,34.6 113.65,34.6 113.85,34.8 114.935,34.8 C25.1@115.05,34.8 ; v3(114.95,22.6) 115.65,22.6 116.52,21.73 C30.1@116.52,20.955 ; C25.1@114.95,35.2 114.95,35.24 v1(114.95,36.6) ; C27.1@115.35,15.6 C27.1@114.9,15.597 v3(117.15,15.6) 117.95,15.6 118.11,15.76 U3.7@118.11,17.915 ; SW6.3@116.54,53.775 v3(116.54,57.8) SW6.4@116.54,61.785 ; C30.1@116.55,20.8 116.55,20.925 C30.1@116.52,20.955 ; C32.1@119.065,20.955 C30.1@116.52,20.955 ; U3.11@121.92,12.565 121.92,14.17 122.35,14.6 124.55,14.6 ; U3.13@124.46,12.565 124.46,14.09 124.55,14.6 ; v3(126.85,17.6) 126.9,17.65 C31.2@128.35,17.65 ; C29.1@127.95,14.6 v3(126.75,14.6) 124.55,14.6 ; SW7.3@145.08,5.96 v3(149.09,5.96) SW7.4@152.95,5.96 SW7.4@153.09,5.96 ; v3(149.45,73.3) 149.7,73.05 R6C.2@149.7,71.8 ; U1C.1@152.75,72.2 v3(152.75,73) ; v3(152.95,65.4) 152.95,66.275 U1C.10@152.95,66.3 ; v1@154.953,60.603 R5C.2@154.953,61.75 ; R33C.2@155.9,17.903 155.9,20.25 155.95,20.3 v3(157.35,20.3) ; C54C.2@156.85,74 C54C.2@157,73.85 ; C54C.2@157,74.6 C54C.2@157,73.85 ; v3(157.75,73.1) C54C.2@157,73.85 ; v1(160.65,101.3) 160.95,101 C56C.2@160.95,99.95
  Top Layer w0.5: 100.15,50.5 v3(100.15,52.2) ; 101.35,51 v3(101.35,52.2) ; v3@157.33,20.32 v3(157.35,20.3)
  Top Layer w0.6: v3(1.35,26.2) 2.6,24.95 R8.2@2.75,24.95 ; v3(9.55,19.6) C3.2@9.55,21.7 ; v3(10.55,55.2) C5.2@12.65,55.2 ; v3(11.95,52.6) U1.4@14.35,52.6 ; U1.4@14.35,52.505 16.055,52.505 v3(16.35,52.8) ; v3(46.65,41.3) 48.45,41.3 v3(50.35,41.3) ; C28.1@63.15,49.4 v3(63.15,51.6)
  Top Layer w0.9: v3(9.35,96) C18.2@9.35,97.8 ; v3(153.65,37) 153.67,36.98 C64C.2@153.67,35.155 ; C65C.2@153.67,25.805 155.455,25.805 v3(155.55,25.9)
  Top Layer w1: v3(14.732,64.77) C63C.2@15.45,62.6 ; C62C.2@18.95,62 v3(21.15,62) ; v3(48.75,24.2) C19.2@48.75,25.9 C19.2@48.75,26 ; D1C.1@114.15,111.2 114.288,110.8 114.373,110.8 v4(116.55,110.8) ; D1C.1@114.288,111.76 114.283,111.781 114.15,112.4 114.288,112.8 114.373,112.8 v4(116.55,112.8)
  Bottom Layer w0.3: C37C.2@69.25,38.75 70.1,38.75 70.85,39.5 ; C40C.2@69.25,42.35 70.25,42.35 v1@70.75,42.85 ; 69.95,25.95 69.95,25.3 70.15,25.1 v1(70.95,25.1) C27C.2@71.9,25.1 ; C36C.2@69.95,29.65 70.6,29.65 v1@70.923,29.327 ; v1@70.5,42.6 v1@70.75,42.85 ; v1(70.55,39.2) 70.8,39.45 C7C.2@71.75,39.45 ; C28C.2@70.75,46.45 71.6,46.45 72.2,47.05 ; v1(70.873,29.277) 70.973,29.277 71.5,28.75 72.6,28.75 73.35,28 v1(73.35,27.5) ; C26C.2@71.55,21.75 71.55,20.7 v1(71.65,20.6) ; C23C.2@71.85,43 71.7,42.85 v1@70.75,42.85 ; v1(71.935,46.785) 72.2,47.05 ; C29C.2@73.15,47.15 v1(73.15,48.2) ; v1@73.55,42.5 73.2,42.85 v1(72.8,42.85) 71.85,42.85 C23C.2@71.75,42.95 71.65,42.85 v1@70.75,42.85 ; v1@73.95,19.9 C44C.2@73.95,20.95 ; C10C.2@75.75,44.55 75.75,43.7 v1(75.95,43.5) ; C16C.2@75.95,23.45 75.95,24.4 v1(76.25,24.7) ; v1(78.15,19.7) 78.15,20.7 78.35,20.9 C33C.2@78.35,20.95 ; C12C.2@79.75,32.75 80.5,32.75 v1(80.75,33) ; v1(79.75,34) C30C.2@79.75,35.15 ; v1(81.75,33) 81.75,31.9 81.9,31.75 83.5,31.75 v1(83.75,32) ; v1(81.75,37) 82.6,37.85 C39C.2@82.75,37.85 ; C39C.2@82.75,37.9 82.85,37.9 v1(83.75,37) ; v1(84.75,34) 84.9,33.85 C38C.2@85.75,33.85 ; v1(84.75,35) 84.05,35.7 84.05,36.3 C31C.2@85.65,37.9 ; C31C.2@85.75,37.85 85.75,37.8 86.55,37 v1(86.75,37) ; v1(87.35,19.8) C32C.2@87.35,20.95 ; v1(89.55,24.5) 89.75,24.3 C15C.2@89.75,23.45 ; C48C.2@91.65,47.25 92.7,47.25 v1(92.913,47.037) 93.5,46.45 C47C.2@94.05,46.45 ; v1@91.95,19.7 C71C.2@91.95,20.85 ; v1(92.65,27.5) 92.65,28.2 93,28.55 C17C.2@93.75,28.55 94.1,28.55 95.1,29.55 95.75,29.55 97,29.55 ; v1(92.7,25.15) 93.75,25.134 v1@94.75,25.119 ; C18C.2@94.05,39.35 C70C.2@94.05,41.15 ; v1@94.15,20.5 C25C.2@94.15,21.65 ; 72.2,47.05 73.15,47.05 72.2,47.05 ; C11C.2@78.15,47.05 v1(78.15,48.2) C11C.2@78.15,47.05
  Bottom Layer w0.4: v1(53.45,33.7) 54.61,33.7 C13C.2@54.75,33.7 ; C20C.2@61.05,34.7 v1(62.05,34.7) ; C8C.2@86.95,47.35 v1(86.95,48.4) ; v1(89.25,43.2) 89.25,44.45 C9C.2@89.55,44.75 ; v1(92.55,41) C70C.2@93.75,41 ; C70C.2@93.75,41.15 93.9,41 v1(95.1,41) 95.75,40.35 ; v1(94.75,25.15) 95.9,25.15 96.25,25.5 C43C.2@96.25,26.15 ; v1(102.85,33.8) 103.15,33.5 C14C.2@103.95,33.5 ; C21C.2@109.95,34.8 v1(111.15,34.8)
  other v1: 73.95,19.8 91.95,19.8 94.15,20.6 97.35,29.5 73.55,42.6 70.55,42.7 66.95,47.5 154.95,60.5
GREEN0: FPGA1C.A7 R103.1 | length 59.5
  Top Layer w0.2: R103.1@61.35,94.05 61.35,92.9 62.25,92 62.25,89.8 64.05,88 v1(64.05,84.3) ; v1(76.55,53.6) 76.55,52.7 76.35,52.5 76.35,51.9 80.05,48.2 80.05,45.4 80.25,45.2 FPGA1C.A7@80.25,42.5
  MidLayer1 w0.2: v1(64.05,84.3) 64.05,78.9 64.95,78 64.95,75.1 75.65,64.4 75.65,55.7 76.55,54.8 v1(76.55,53.6)
GREEN1: FPGA1C.C7 R105.1 | length 61.2
  Top Layer w0.2: R105.1@63.95,94.05 63.95,93.1 64.75,92.3 64.75,90 68.05,86.7 v1(68.05,83.2) ; FPGA1C.C7@80.25,40.5 v1(80.75,41)
  MidLayer1 w0.2: v1(68.05,83.2) 68.047,82.398 67.501,81.849 67.501,74.749 76.45,65.8 76.45,56.1 77.55,55 77.55,48 80.75,44.8 v1(80.75,41)
GREEN2: FPGA1C.A8 R110.1 | length 58.2
  Top Layer w0.2: R110.1@66.55,94.05 66.55,93.5 67.25,92.8 67.25,90 70.75,86.5 v1(70.75,83.7) ; v1(81.15,45.9) 81.25,45.8 FPGA1C.A8@81.25,42.5
  MidLayer1 w0.2: v1(70.75,83.7) 70.05,83 70.05,74.6 77.25,67.4 77.25,57.5 78.35,56.4 78.35,49.7 80.45,47.6 80.45,46.6 v1(81.15,45.9)
GREEN#: J5.2 R104.2 R105.2 R110.2 | length 16
  Top Layer w0.4: R104.2@58.75,95.95 58.75,97.2 59.15,97.6 63.95,97.6 ; R105.2@63.95,95.95 63.95,97.6 ; J5.2@64.774,100.965 64.774,99.024 63.95,98.2 63.95,97.6 ; R110.2@66.55,95.95 66.55,97.2 66.15,97.6 63.95,97.6
HARD_TCK: FPGA1C.K18 R6C.1 TP2C.1 U1C.5 | length 90.5
  Top Layer w0.2: FPGA1C.K18@91.25,33.5 93.15,33.5 93.65,34 v1(93.65,35.6) ; v1(147.95,67.7) 147.95,68.6 R6C.1@149.2,69.85
  Top Layer w0.3: R6C.1@149.647,69.85 151.3,69.85 151.625,69.525 U1C.5@152.875,69.525
  MidLayer2 w0.2: v1(147.25,59.6) 147.25,57.8 147.85,57.2 151.05,57.2 TP2C.1@152.25,56
  Bottom Layer w0.2: v1(93.65,35.6) 94.05,35.2 100.75,35.2 102.143,36.593 102.55,37 105.384,37 106.284,37.9 108.119,37.9 119.519,49.3 124.05,49.3 128.95,54.2 141.75,54.2 146.762,59.212 146.762,61.612 147.65,62.5 147.65,67.4 v1(147.95,67.7) ; 146.762,59.6 v1(147.25,59.6)
HARD_TDI: FPGA1C.J17 R4C.2 TP3C.1 U1C.9 | length 87.9
  Top Layer w0.2: FPGA1C.J17@90.25,34.5 90.75,35 91.618,35 91.718,35.1 92.182,35.1 92.282,35 v1(92.85,35) ; v1(148.05,58.9) 148.95,59.8 148.95,64.5 149.75,65.3 R4C.2@149.75,66.05 ; R4C.2@149.653,66.05 150.7,66.05 151.575,66.925 U1C.9@152.875,66.925
  MidLayer2 w0.2: v1(148.05,58.9) 152.25,58.9 TP3C.1@155.15,56
  Bottom Layer w0.2: v1(92.85,35) 93.05,34.8 100.95,34.8 102.329,36.179 102.75,36.6 105.55,36.6 106.45,37.5 108.284,37.5 119.684,48.9 124.25,48.9 129.15,53.8 141.95,53.8 147.05,58.9 v1(148.05,58.9)
HARD_TDO: FPGA1C.K13 TP4C.1 U1C.17 | length 100.1
  Top Layer w0.2: FPGA1C.K13@86.25,33.5 v1(86.75,34) ; v1(156.35,64.9) 156.55,65.1 156.55,68.734 157.991,70.175 U1C.17@159.425,70.175
  MidLayer2 w0.14: 88.25,34.5 90.25,34.5
  MidLayer2 w0.2: v1(86.75,34) 87.25,34.5 88.25,34.5 ; 90.25,34.5 90.381,34.5 92.481,36.6 106.45,36.6 v1(106.75,36.9)
  Bottom Layer w0.2: v1(106.75,36.9) 108.25,36.9 119.85,48.5 124.45,48.5 129.35,53.4 142.15,53.4 146.95,58.2 148.65,58.2 155.35,64.9 v1(156.35,64.9) 158.05,63.2 TP4C.1@158.05,56
HARD_TMS: FPGA1C.K14 R3C.2 TP1C.1 U1C.7 | length 92.3
  Top Layer w0.2: v1(86.75,33) FPGA1C.K14@87.25,33.5 ; v1(145.95,59.6) 146.55,60.2 146.55,62.9 147.3,63.65 R3C.2@147.747,63.65 147.747,66.297 148.45,67 150.85,67 151.05,67.2 151.05,67.9 151.375,68.225 U1C.7@152.875,68.225
  MidLayer2 w0.2: v1(86.75,33) 87.75,34 90.45,34 91.75,32.7 103.65,32.7 112.95,42 112.95,42.1 119.35,48.5 125.65,48.5 130.55,53.4 139.75,53.4 v1(145.95,59.6) 145.95,57.6 147.55,56 TP1C.1@149.45,56
HSYNC: FPGA1C.D6 R94.1 | length 75.8
  Top Layer w0.2: R94.1@48.35,99.05 v1@53.2,99.05 ; v1(78.75,40) FPGA1C.D6@79.25,39.5
  Top Layer w0.4: R94.1@48.2,99.05 R94.1@48.35,99.05
  MidLayer1 w0.14: 79.25,40.5 79.25,41.5
  MidLayer1 w0.2: v1(53.25,99.1) 57.15,95.2 57.15,85.4 58.25,84.3 58.25,82.3 59.875,80.675 59.875,74.675 74.05,60.5 74.05,53.9 75.55,52.4 75.55,51.2 76.35,50.4 76.35,47.4 79.25,44.5 79.25,41.5 ; v1(78.75,40) 79.25,40.5
IO0: FPGA1C.V6 HDR1.2 | length 20.3
  Top Layer w0.2: FPGA1C.V6@79.25,25.5 79.35,25.4 79.35,13.7 81.915,11.135 HDR1.2@81.915,6.35
IO1: FPGA1C.T7 HDR1.3 | length 26.9
  Top Layer w0.2: v1(79.75,27) FPGA1C.T7@80.25,27.5
  MidLayer1 w0.2: v1(79.75,27) 79.75,13.9 85.75,7.9 85.75,5.105 HDR1.3@84.455,3.81
IO2: FPGA1C.U7 HDR1.4 | length 22.3
  Top Layer w0.2: FPGA1C.U7@80.25,26.5 79.75,26 79.75,13.869 84.455,9.164 HDR1.4@84.455,6.35
IO3: FPGA1C.V7 HDR1.5 | length 24.5
  Top Layer w0.2: FPGA1C.V7@80.25,25.5 80.25,13.934 85.75,8.434 85.75,5.055 HDR1.5@86.995,3.81
IO4: FPGA1C.R8 HDR1.6 | length 25.4
  Top Layer w0.2: v1(80.75,28) FPGA1C.R8@81.25,28.5
  MidLayer1 w0.144: 80.25,26.5 80.25,27.5
  MidLayer1 w0.2: 80.25,26.5 80.25,14.1 86.995,7.355 HDR1.6@86.995,6.35 ; 80.25,27.5 v1(80.75,28)
IO5: FPGA1C.T8 HDR1.7 | length 28.1
  Top Layer w0.2: v1(80.75,27) FPGA1C.T8@81.25,27.5
  MidLayer1 w0.2: v1(80.75,27) 80.75,14.2 86.75,8.2 87.65,8.2 88.25,7.6 88.25,5.095 HDR1.7@89.535,3.81
IO6: FPGA1C.U8 HDR1.8 | length 24.7
  Top Layer w0.2: FPGA1C.U8@81.25,26.5 80.75,26 80.75,14 86.55,8.2 87.685,8.2 HDR1.8@89.535,6.35
IO7: FPGA1C.V8 HDR1.9 | length 27.9
  Top Layer w0.2: FPGA1C.V8@81.25,25.5 81.25,14.1 86.75,8.6 89.75,8.6 90.75,7.6 90.75,5.135 HDR1.9@92.075,3.81
IO8: FPGA1C.N8 HDR1.10 | length 30.6
  Top Layer w0.2: v1(80.75,30) FPGA1C.N8@81.25,30.5
  MidLayer2 w0.14: 80.25,26.5 80.25,28.5
  MidLayer2 w0.2: 80.25,26.5 80.25,16.2 88.45,8 90.425,8 HDR1.10@92.075,6.35 ; 80.25,28.5 80.75,29 v1(80.75,30)
IO9: FPGA1C.P9 HDR1.11 | length 33.8
  Top Layer w0.2: v1(81.75,29) FPGA1C.P9@82.25,29.5
  MidLayer2 w0.14: 81.25,26.5 81.25,28.5
  MidLayer2 w0.2: 81.25,26.5 81.25,15.8 88.65,8.4 92.35,8.4 93.35,7.4 93.35,5.075 HDR1.11@94.615,3.81 HDR1.11@94.615,3.835 ; 81.25,28.5 v1(81.75,29)
IO10: FPGA1C.R9 HDR1.12 | length 31.3
  Top Layer w0.2: v1(81.75,28) FPGA1C.R9@82.25,28.5
  MidLayer1 w0.14: 81.25,26.5 81.25,27.5
  MidLayer1 w0.2: 81.25,26.5 81.25,14.3 86.95,8.6 92.365,8.6 HDR1.12@94.615,6.35 ; 81.25,27.5 v1(81.75,28)
IO11: FPGA1C.T9 HDR1.13 | length 34.6
  Top Layer w0.2: v1(81.75,27) FPGA1C.T9@82.25,27.5
  MidLayer1 w0.2: v1(81.75,27) 81.75,14.4 87.15,9 94.45,9 95.95,7.5 95.95,5.2 97.155,3.995 HDR1.13@97.155,3.81
IO12: FPGA1C.U9 HDR1.14 | length 31.2
  Top Layer w0.2: FPGA1C.U9@82.25,26.5 81.75,26 81.75,14.2 86.95,9 94.505,9 HDR1.14@97.155,6.35
IO13: FPGA1C.V9 HDR1.15 | length 34.2
  Top Layer w0.2: FPGA1C.V9@82.25,25.5 82.25,14.3 87.15,9.4 96.15,9.4 98.45,7.1 98.45,5.055 HDR1.15@99.695,3.81
IO14: FPGA1C.P10 HDR1.16 | length 36.4
  Top Layer w0.2: v1(82.75,29) FPGA1C.P10@83.25,29.5
  MidLayer2 w0.14: 82.25,26.5 82.25,28.5
  MidLayer2 w0.2: 82.25,26.5 82.25,15.4 88.85,8.8 98.45,8.8 99.695,7.555 HDR1.16@99.695,6.35 ; 82.25,28.5 v1(82.75,29)
IO15: FPGA1C.R10 HDR1.17 | length 40.5
  Top Layer w0.2: v1(82.75,28) FPGA1C.R10@83.25,28.5
  MidLayer1 w0.14: 82.25,26.5 82.25,27.5
  MidLayer1 w0.2: 82.25,26.5 82.25,14.5 87.35,9.4 99.55,9.4 100.95,8 100.95,5.095 HDR1.17@102.235,3.81 ; 82.25,27.5 v1(82.75,28)
IO16: FPGA1C.T10 HDR1.18 | length 36.6
  Top Layer w0.2: v1(82.75,27) FPGA1C.T10@83.25,27.5
  MidLayer1 w0.2: v1(82.75,27) 82.75,14.6 87.55,9.8 99.85,9.8 102.235,7.415 HDR1.18@102.235,6.35
IO17: FPGA1C.U10 HDR1.19 | length 40.2
  Top Layer w0.2: FPGA1C.U10@83.25,26.5 82.75,26 82.75,14.4 87.35,9.8 101.25,9.8 103.45,7.6 103.45,5.135 HDR1.19@104.775,3.81
IO18: FPGA1C.V10 HDR2.2 | length 48.6
  Top Layer w0.2: FPGA1C.V10@83.25,25.5 83.25,14.5 87.55,10.2 101.45,10.2 103.85,7.8 115.99,7.8 HDR2.2@117.44,6.35
IO19: FPGA1C.N9 HDR2.3 | length 59.9
  Top Layer w0.2: v1(81.75,31) FPGA1C.N9@82.25,30.5
  MidLayer2 w0.14: 83.25,26.5 83.25,29.5
  MidLayer2 w0.2: v1(81.75,31) 83.25,29.5 ; 83.25,26.5 83.25,15 89.05,9.2 98.65,9.2 100.15,7.7 118.15,7.7 118.75,7.1 118.75,5.04 HDR2.3@119.98,3.81
IO20: FPGA1C.R11 HDR2.4 | length 54.4
  Top Layer w0.2: v1(83.75,28) FPGA1C.R11@84.25,28.5
  MidLayer1 w0.14: 83.25,26.5 83.25,27.5
  MidLayer1 w0.2: 83.25,26.5 83.25,14.7 87.75,10.2 100.05,10.2 102.45,7.8 118.53,7.8 HDR2.4@119.98,6.35 ; 83.25,27.5 v1(83.75,28)
IO21: FPGA1C.T11 HDR2.5 | length 57.7
  Top Layer w0.2: v1(83.75,27) FPGA1C.T11@84.25,27.5
  MidLayer1 w0.2: v1(83.75,27) 83.75,14.8 87.95,10.6 100.25,10.6 102.65,8.2 120.65,8.2 121.25,7.6 121.25,5.08 HDR2.5@122.52,3.81
IO22: FPGA1C.U11 HDR2.6 | length 54.3
  Top Layer w0.2: FPGA1C.U11@84.25,26.5 83.75,26 83.75,14.6 87.75,10.6 101.65,10.6 104.05,8.2 120.67,8.2 HDR2.6@122.52,6.35
IO23: FPGA1C.V11 HDR2.7 | length 57.6
  Top Layer w0.2: FPGA1C.V11@84.25,25.5 84.25,14.7 87.95,11 101.85,11 104.25,8.6 122.75,8.6 123.75,7.6 123.75,5.12 HDR2.7@125.06,3.81
IO24: FPGA1C.N10 HDR2.8 | length 60.5
  Top Layer w0.2: FPGA1C.N10@83.25,30.5 83.75,30 v1(83.75,29)
  MidLayer2 w0.14: 84.25,26.5 84.25,28.5
  MidLayer2 w0.2: v1(83.75,29) 84.25,28.5 ; 84.25,26.5 84.25,14.6 89.25,9.6 98.85,9.6 100.35,8.1 123.31,8.1 HDR2.8@125.06,6.35
IO25: FPGA1C.P12 HDR2.9 | length 63.8
  Top Layer w0.2: v1(84.75,29) FPGA1C.P12@85.25,29.5
  MidLayer2 w0.14: 85.25,26.5 85.25,28.5
  MidLayer2 w0.2: v1(84.75,29) 85.25,28.5 ; 85.25,26.5 85.25,14.2 89.45,10 99.05,10 100.55,8.5 125.35,8.5 126.35,7.5 126.35,5.06 HDR2.9@127.6,3.81
IO26: FPGA1C.R12 HDR2.10 | length 60.9
  Top Layer w0.2: v1(84.75,28) FPGA1C.R12@85.25,28.5
  MidLayer1 w0.14: 84.25,26.5 84.25,27.5
  MidLayer1 w0.2: 84.25,26.5 84.25,14.9 88.15,11 100.55,11 102.95,8.6 125.35,8.6 HDR2.10@127.6,6.35 ; 84.25,27.5 v1(84.75,28)
IO27: FPGA1C.T12 HDR2.11 | length 64.1
  Top Layer w0.2: v1(84.75,27) FPGA1C.T12@85.25,27.5
  MidLayer1 w0.2: v1(84.75,27) 84.75,15 85.15,14.6 88.35,11.4 100.85,11.4 103.25,9 127.35,9 128.95,7.4 128.95,5 HDR2.11@130.14,3.81
IO28: FPGA1C.U12 HDR2.12 | length 60.7
  Top Layer w0.2: FPGA1C.U12@85.25,26.5 84.75,26 84.75,14.9 88.25,11.4 102.05,11.4 104.45,9 127.49,9 HDR2.12@130.14,6.35
IO29: FPGA1C.V12 HDR2.13 | length 63.9
  Top Layer w0.2: FPGA1C.V12@85.25,25.5 85.25,15.1 86.25,14.1 90.05,14.1 92.35,11.8 102.25,11.8 104.65,9.4 129.55,9.4 131.35,7.6 131.35,5.14 HDR2.13@132.68,3.81
IO30: FPGA1C.P13 HDR2.14 | length 66.4
  Top Layer w0.2: v1(85.75,29) FPGA1C.P13@86.25,29.5
  MidLayer2 w0.14: 86.25,26.5 86.25,28.5
  MidLayer2 w0.2: v1(85.75,29) 86.25,28.5 ; 86.25,26.5 86.25,13.8 89.65,10.4 99.25,10.4 100.75,8.9 131.45,8.9 132.68,7.67 HDR2.14@132.68,6.35
IO31: FPGA1C.R13 HDR2.15 | length 65.6
  Top Layer w0.2: v1(85.75,28) FPGA1C.R13@86.25,28.5
  MidLayer1 w0.14: 85.25,26.5 85.25,27.5
  MidLayer1 w0.2: 85.25,26.5 85.25,23 96.45,11.8 101.15,11.8 103.55,9.4 132.65,9.4 133.95,8.1 133.95,5.08 HDR2.15@135.22,3.81 ; 85.25,27.5 v1(85.75,28)
IO32: FPGA1C.T13 HDR2.16 | length 62.5
  Top Layer w0.2: v1(85.75,27) FPGA1C.T13@86.25,27.5
  MidLayer1 w0.2: v1(85.75,27) 85.75,23.1 96.65,12.2 101.35,12.2 103.75,9.8 134.25,9.8 135.22,8.83 HDR2.16@135.22,6.35
IO33: FPGA1C.U13 HDR2.17 | length 69.7
  Top Layer w0.2: FPGA1C.U13@86.25,26.5 85.75,26 85.75,15.166 86.416,14.5 90.25,14.5 92.55,12.2 102.45,12.2 104.85,9.8 134.25,9.8 136.45,7.6 136.45,5.12 HDR2.17@137.76,3.81
IO34: FPGA1C.V13 HDR2.18 | length 64.4
  Top Layer w0.2: FPGA1C.V13@86.25,25.5 86.25,25.207 86.15,25.107 86.15,17.9 86.65,17.4 90.15,17.4 94.95,12.6 102.65,12.6 105.05,10.2 134.45,10.2 137.76,6.89 HDR2.18@137.76,6.35
IO35: FPGA1C.T14 HDR2.19 | length 67.9
  Top Layer w0.2: v1(86.75,27) FPGA1C.T14@87.25,27.5
  MidLayer1 w0.2: v1(86.75,27) 86.75,25.1 86.55,24.9 86.55,22.9 96.85,12.6 101.55,12.6 103.95,10.2 136.15,10.2 139.05,7.3 139.05,5.06 HDR2.19@140.3,3.81
KBCLOCK: FPGA1C.F15 R89.1 | length 86.2
  Top Layer w0.2: FPGA1C.F15@88.25,37.5 v1(88.75,38) ; R89.1@119.35,98.05 119.35,96.6 121.55,94.4 121.55,80.7 120.75,79.9 120.75,64.3 v1(122.25,62.8)
  MidLayer1 w0.14: 89.25,38.5 90.25,38.5
  MidLayer1 w0.2: v1(88.75,38) 89.25,38.5 ; 90.25,38.5 90.85,38.5 92.35,40 104.95,40 105.65,40.7 108.053,40.7 122.25,54.897 v1(122.25,62.8)
KBDATA: FPGA1C.F16 R88.1 | length 85.1
  Top Layer w0.2: FPGA1C.F16@89.25,37.5 v1(89.75,38) ; R88.1@121.95,98.05 121.95,80.3 121.15,79.5 121.15,65.4 v1(122.95,63.6)
  MidLayer1 w0.2: v1(89.75,38) 90.95,38 92.55,39.6 105.15,39.6 105.85,40.3 108.219,40.3 122.95,55.031 v1(122.95,63.6)
LED0: FPGA1C.R1 LD0.1 | length 30.3
  Top Layer w0.2: LD0.1@49.53,20.635 49.53,22.08 51.85,24.4 71.219,24.4 72.35,25.531 72.35,28 72.85,28.5 FPGA1C.R1@74.25,28.5
LED1: FPGA1C.R2 LD1.1 | length 29.2
  Top Layer w0.2: LD1.1@52.07,20.635 52.07,22.82 53.25,24 71.384,24 72.75,25.366 72.75,27.8 73.05,28.1 73.582,28.1 73.682,28 74.75,28 FPGA1C.R2@75.25,28.5
LED2: FPGA1C.T2 LD2.1 | length 25.3
  Top Layer w0.2: LD2.1@54.61,20.635 54.61,22.56 55.65,23.6 71.55,23.6 73.15,25.2 73.15,26.4 73.75,27 74.75,27 FPGA1C.T2@75.25,27.5
LED3: FPGA1C.U3 LD3.1 | length 23.2
  Top Layer w0.2: LD3.1@57.15,20.635 57.15,22.5 57.85,23.2 71.75,23.2 72.95,24.4 75.118,24.4 75.75,25.032 75.75,26 FPGA1C.U3@76.25,26.5
LED4: FPGA1C.U4 LD4.1 | length 22.1
  Top Layer w0.2: LD4.1@59.69,20.635 59.69,22.44 60.05,22.8 75.25,22.8 76.85,24.4 76.85,24.932 76.75,25.032 76.75,26 FPGA1C.U4@77.25,26.5
LED5: FPGA1C.V4 LD5.1 | length 18.4
  Top Layer w0.2: LD5.1@62.23,20.635 62.23,21.68 62.95,22.4 75.45,22.4 77.25,24.2 FPGA1C.V4@77.25,25.5
LED6: FPGA1C.U5 LD6.1 | length 17.6
  Top Layer w0.2: LD6.1@64.77,20.635 64.77,21.62 65.15,22 75.65,22 77.65,24 77.65,24.932 77.75,25.032 77.75,26 FPGA1C.U5@78.25,26.5
LED7: FPGA1C.U6 LD7.1 | length 15.5
  Top Layer w0.2: LD7.1@67.31,20.635 68.285,20.635 69.25,21.6 76.05,21.6 78.95,24.5 78.95,24.9 78.75,25.1 78.75,26 FPGA1C.U6@79.25,26.5
LED_DONE: FPGA1C.K17 R24.1 | length 60.5
  Top Layer w0.2: FPGA1C.K17@90.25,33.5 90.75,34 91.618,34 91.718,33.9 92.65,33.9 v1(92.85,34.1) ; R24.1@133.65,12.5 134.05,12.9 v1(135.25,12.9)
  Bottom Layer w0.2: v1(92.85,34.1) 93.117,34.367 101.117,34.367 102.85,36.1 105.45,36.1 106.25,35.3 106.25,34.4 107.15,33.5 107.15,29.266 108.016,28.4 112.25,28.4 113.15,27.5 114.85,27.5 115.147,27.203 125.65,16.7 127.057,16.7 130.857,12.9 v1(135.25,12.9)
MOUSECLOCK: FPGA1C.G16 R93.1 | length 121.6
  Top Layer w0.2: FPGA1C.G16@89.25,36.5 v1(89.75,37)
  Top Layer w0.4: R93.1@158.35,99.95 158.35,100.6 v3(159.05,101.3)
  MidLayer1 w0.2: v1(89.75,37) 91.35,37 92.35,38 104.75,38 106.25,39.5 108.55,39.5 124.15,55.1 v1(124.15,65)
  Bottom Layer w0.4: 123.05,80.5 123.05,79.7 121.65,78.3 121.65,65.6 122.25,65 v1(124.15,65) ; 123.05,80.6 123.05,81.5 127.75,86.2 127.75,93.2 129.45,94.9 137.05,94.9 138.95,96.8 154.55,96.8 v3(159.05,101.3)
MOUSEDATA: FPGA1C.G15 R92.1 | length 72.5
  Top Layer w0.2: FPGA1C.G15@88.25,36.5 v1(88.75,37)
  Top Layer w0.3: v1(123.55,64.3) 121.65,66.2 121.65,79.2 123.825,81.375 R92.1@123.825,82.87
  MidLayer1 w0.14: 89.25,37.5 90.25,37.5
  MidLayer1 w0.2: v1(88.75,37) 89.25,37.5 ; 90.25,37.5 91.25,37.5 92.15,38.4 104.55,38.4 106.05,39.9 108.384,39.9 123.55,55.066 v1(123.55,64.3)
NetC1_1: C1.1 C8.2 RN1.7 U2.1 | length 35.6
  Top Layer w0.4: C1.1@2.55,16.6 C1.1@2.55,16.7 2.55,17.8 3.15,18.4 v3(6.95,18.4) v3(11.35,18.4) 12.35,18.4 12.645,18.695 U2.1@12.645,20 ; RN1.7@10.795,36.195 10.795,37.545 11,37.75 C8.2@11,39.4
  Bottom Layer w0.4: v3(6.95,18.4) 6.95,30.6 10.795,34.445 RN1.7@10.795,36.195
NetC1_2: C1.2 R2.1 R4.1 | length 6.7
  Top Layer w0.4: R4.1@3.5,10.8 3.5,11.65 2.55,12.6 C1.2@2.55,13.7 5.5,13.7 R2.1@5.8,13.4
NetC2_1: C2.1 C10.2 RN2.7 U2.7 | length 20
  Top Layer w0.4: C10.2@11.2,32.4 11.2,30.25 10.795,29.845 RN2.7@10.795,28.575 11.97,27.4 13.15,27.4 13.915,26.635 U2.7@13.915,25.2 ; v3(17.95,25.4) C2.1@20.15,25.4
  Bottom Layer w0.4: RN2.7@10.795,28.575 13.97,25.4 v3(17.95,25.4)
NetC2_2: C2.2 R3.1 R5.1 | length 8.1
  Top Layer w0.4: C2.2@20.55,22 20.6,22.05 R5.1@23.35,22.05 25.1,22.05 25.35,21.8 25.35,20 25.15,19.8 R3.1@24.1,19.8
NetC5_1: C5.1 C34.2 U1.3 | length 7.9
  Top Layer w0.4: U1.3@14.35,51.235 17.165,51.235 C34.2@17.2,51.2 17.2,54.35 16.35,55.2 C5.1@15.65,55.2
NetC6_2: C6.2 C40.2 RN1.1 | length 18.9
  Top Layer w0.4: RN1.1@26.035,36.195 34.555,36.195 36.46,34.29 C40.2@38.767,34.29 38.767,32.017 37.97,31.22 C6.2@37.97,29.21
NetC7_2: C7.2 C41.2 RN2.1 | length 18.7
  Top Layer w0.4: RN2.1@26.035,28.575 31.575,28.575 34.75,25.4 C7.2@37.97,25.4 37.97,22.58 38.767,21.783 C41.2@38.767,20.32
NetC8_1: C8.1 RN1.6 U2.2 | length 22.8
  Top Layer w0.4: C8.1@12.9,39.4 12.9,37.85 13.335,37.415 RN1.6@13.335,36.195 ; U2.2@13.95,20.2 v3(13.95,22.2)
  Bottom Layer w0.4: RN1.6@13.335,36.195 13.335,34.585 9.55,30.8 9.55,26.6 v3(13.95,22.2)
NetC9_2: C9.2 C14.2 RN1.4 RN1.5 RN1.10 | length 27.5
  Top Layer w0.4: C9.2@3.175,33.335 4.35,33.335 ; RN1.10@3.175,36.195 4.35,36.2 ; C14.2@5.715,33.335 4.35,33.335 ; RN1.5@15.875,36.195 RN1.4@18.415,36.195 ; 17.15,36.2 17.15,38.6 14.95,40.8 8.35,40.8 4.35,36.8 4.35,36.2 ; 4.35,33.335 4.35,36.2
NetC10_1: C10.1 RN2.6 U2.6 | length 8.1
  Top Layer w0.4: C10.1@13.1,32.4 13.1,30.05 13.335,29.815 RN2.6@13.335,28.575 13.375,28.575 15.185,26.765 U2.6@15.185,25.2
NetC11_2: C11.2 C15.2 RN2.4 RN2.5 RN2.10 | length 22.5
  Top Layer w0.4: RN2.10@3.175,28.575 3.175,28.625 4.55,30 6.9,30 C11.2@8.35,31.45 9,31.45 9.75,32.2 9.75,33.6 10.35,34.2 13.35,34.2 14.35,33.2 14.35,32.65 C15.2@15.55,31.45 ; C15.2@15.95,31.45 15.875,31.375 RN2.5@15.875,28.575 RN2.4@18.415,28.575
NetC12_1: C12.1 C16.2 | length 2.6
  Top Layer w0.4: C12.1@23.75,31.45 C16.2@26.35,31.45
NetC12_2: C12.2 RN1.2 RN1.3 | length 6.4
  Top Layer w0.4: RN1.3@20.955,36.195 22.15,36.195 ; RN1.2@23.495,36.195 22.15,36.195 ; C12.2@23.75,33.35 23.75,34.4 23.35,34.8 22.75,34.8 22.15,35.4 22.15,36.195
NetC13_1: C13.1 C17.2 | length 3.2
  Top Layer w0.4: C17.2@18.55,31.45 19,31.45 C13.1@20.95,33.4
NetC13_2: C13.2 RN2.2 RN2.3 | length 5.5
  Top Layer w0.4: C13.2@21.15,31.45 21.15,30 20.955,29.805 RN2.3@20.955,28.575 RN2.2@23.495,28.575
NetC20_1: C20.1 U4.1 | length 5.3
  Top Layer w0.3: C20.1@14.75,94.95 14.75,95.8 14.95,96 16.75,96 17.275,95.475 U4.1@17.275,93.825
NetC20_2: C20.2 U4.3 | length 6.4
  Top Layer w0.3: C20.2@14.75,93.05 14.75,92.2 15.15,91.8 17.75,91.8 18.575,92.625 U4.3@18.575,93.825
NetC21_2: C21.2 U4.2 | length 5.4
  Top Layer w0.3: C21.2@14.75,96.65 16.9,96.65 17.925,95.625 U4.2@17.925,93.825
NetC22_1: C22.1 U4.4 | length 10.3
  Top Layer w0.3: C22.1@12.15,93.05 12.15,92 12.95,91.2 17.95,91.2 19.225,92.475 U4.4@19.225,93.825
NetC22_2: C22.2 U4.5 | length 11.1
  Top Layer w0.3: C22.2@12.15,94.95 v3(12.15,96.6) ; v3(18.75,96) 19.875,94.875 U4.5@19.875,93.825
  Bottom Layer w0.3: v3(12.15,96.6) 14.95,96.6 15.55,96 v3(18.75,96)
NetC30_2: C30.2 L1.2 | length 4.9
  Top Layer w0.4: C30.2@114.62,20.955 113.705,20.955 113.15,20.4 113.15,18.9 113.45,18.6 114.6,18.6 L1.2@114.7,18.6
NetC31_1: C31.1 CR1.2 R112.2 U3.3 | length 15.3
  Top Layer w0.4: U3.3@123.19,17.915 123.19,19.04 123.75,19.6 124.15,19.6 R112.2@125.35,20.8 ; R112.2@125.35,21 125.355,21.005 125.41,21.005 127.955,21.005 ; CR1.2@127.94,26.035 129.515,26.035 129.95,25.6 129.95,23 127.955,21.005 ; C31.1@127.95,19.9 127.955,19.905 127.955,21.005